# Altium PCB JacdacBrainF4 41.PcbDoc (part 2 of 2)
Units mm, origin at the board's own origin, x right, y up, seen from the top; angles counter-clockwise.
Board outline 19 x 37.35 mm, 2 copper layers (Top Layer, Bottom Layer), stack 1.525 mm thick; 50 components, 34 nets, 190 pads, 37 vias.
Unrouted connection lines stored in the file: 48.
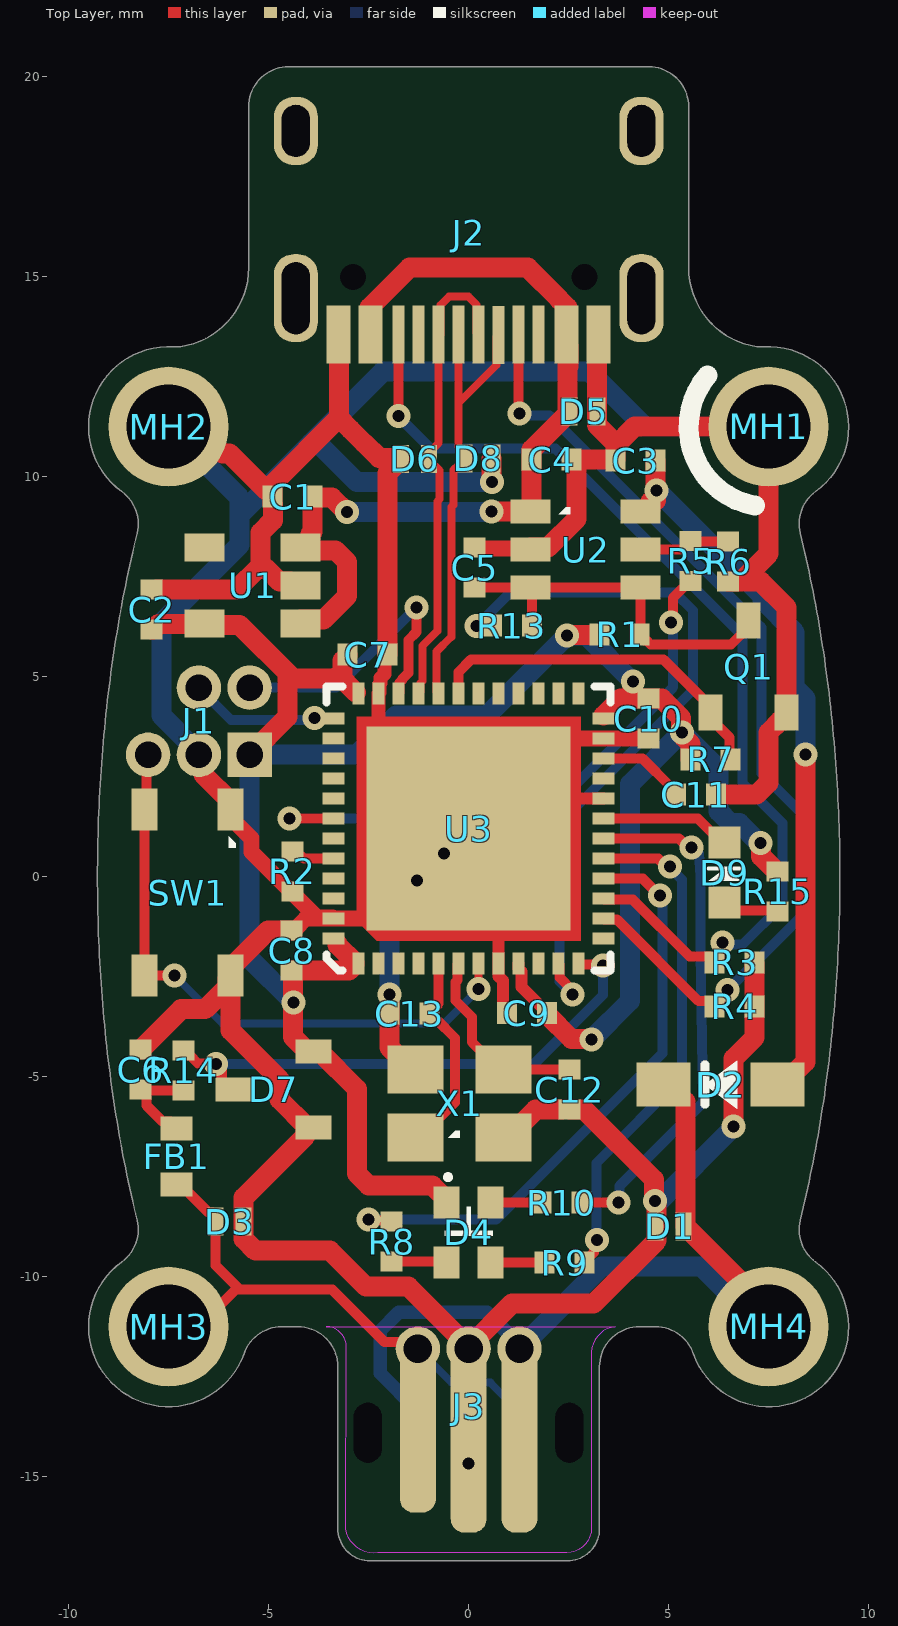
[diagram p0: Top Layer view]

## Via types
v1: diameter 0.6, hole 0.3, Top Layer to Bottom Layer, tented both sides, 37 vias

## Nets (pads, with @x,y where several pads share a name; then routed paths per layer and width w, separated by ;. In a path a pad name is that pad's centre, name@x,y a point inside that pad or via, vN(x,y) a via of type N, cw(c..) or ccw(c..) an arc to the next point about the centre after c; other vN are vias at no path point) (continued)
CC1: (continued)
  Top Layer w0.25: J2.A5 1.25,11.606 v1(1.275,11.581) ; U3.14 3.4,-1.075 3.713,-1.075 5.741,-3.104 6.025,-3.104 R4.1@6.15,-3.229 ; R4.1 R4.1@6.15,-3.229 ; v1(6.475,-2.833) 6.475,-2.9 6.15,-3.225 R4.1@6.15,-3.229
  Bottom Layer w0.25: v1(1.275,11.581) 1.328,11.529 2.026,11.529 7.245,6.309 7.318,6.236 7.318,2.587 8.477,1.428 8.453,1.404 8.453,-0.855 v1(6.475,-2.833)
CC2: J2.B5 R3.1 U3.15 | length 26
  Top Layer w0.25: v1(-1.75,11.517) J2.B5 ; U3.15 3.4,-0.575 4.103,-0.575 5.525,-1.997 6.025,-1.997 6.15,-2.122 R3.1 6.275,-2.015 6.275,-1.816 6.346,-1.745 v1(6.346,-1.65)
  Bottom Layer w0.25: v1(-1.75,11.517) -1.75,11.5 -0.95,10.7 2.169,10.7 6.843,6.026 6.843,2.34 6.859,2.324 7.844,1.339 7.844,-0.701 6.848,-1.697 6.393,-1.697 v1(6.346,-1.65)
GND: C1.1 C2.1 C3.1 C4.1 C5.1 C6.1 C7.1 C8.1 C9.1 C10.1 C11.1 C12.1 C13.1 D1.2 D3.2 D5.2 D6.2 D7.1 D8.2 J1.3 J2.A1 J2.A12 J2.B1 J2.B12 J3.2 MH1.1 MH2.1 Q1.2 R2.1 R3.2 R4.2 R6.1 SW1.1 SW1.2 U1.2 U2.2 U3.8 U3.20 U3.23 U3.35 U3.47 U3.49 X1.2 X1.4 | length 150.2
  Top Layer w0.3: C9.1 0.853,-3.312 0.853,-2.592 0.75,-2.489 U3.8 0.75,0.45 U3.49 0.75,1.95 U3.20
  Top Layer w0.35: C7.1@-2.028,5.547 -2.1,5.475 -2.1,5.074 -2.2,4.974 -2.2,4.838 -2.225,4.813 -2.225,4.6 U3.35 -2.25,3.45 U3.49
  Top Layer w0.4: SW1.2 SW1.2@-5.95,-2.275 ; SW1.1 -5.95,1.475 -5.426,0.951 -5.426,0.616 -3.786,-1.025 -3.4,-1.025 U3.47 -4.08,-1.05 -4.314,-1.284 -4.314,-1.298 -4.364,-1.348 C8.1@-4.389,-1.348 ; U3.47@-3.3,-1.04 -2.24,-1.04 U3.49 ; C5.1 0.175,8.2 U2.2@1.525,8.2 ; U3.49@0.75,1.95 2.25,3.45 U3.23 C10.1@4.375,3.45
  Top Layer w0.5: C6.1 -8.175,-4.325 -8.175,-4.3 -7.187,-3.312 -6.587,-3.312 -6.025,-2.75 -6.025,-2.55 SW1.2 ; C2.1@-7.8,7.175 -5.807,7.175 -5.2,7.782 ; MH2.1 -6.824,11.25 -6.158,10.584 -5.984,10.584 C1.1@-5.06,9.66 ; J1.3 -6.628,2.933 -6.628,2.553 -5.95,1.875 SW1.1 ; SW1.2@-5.95,-2.75 -5.95,-3.845 -4.73,-5.065 -4.73,-5.57 D7.1@-4.025,-6.275 ; SW1.2@-5.95,-2.275 -5.023,-1.348 C8.1@-4.389,-1.348 ; D3.2 -5.625,-9.057 -5.332,-9.35 -3.464,-9.35 -2.564,-10.25 -1.505,-10.25 J3.2@0,-11.755 ; D3.2@-5.625,-8.525 -5.625,-8.025 -4.075,-6.475 -4.075,-6.325 D7.1@-4.025,-6.275 ; -5.2,7.695 -5.2,8.605 -4.895,8.91 -4.895,9.324 -4.9,9.329 C1.1 -4.9,9.82 -3.247,11.473 ; -5.075,7.72 -4.73,7.375 -4.45,7.375 U1.2@-4.3,7.225 ; D7.1 D7.1@-4.025,-6.275 ; J2.B1@-3.247,13.371 -3.247,11.473 ; C7.1 -2.025,10.094 D6.2@-1.672,10.447 ; v1(-1.975,-2.94) C13.1 -1.975,-4.275 -1.425,-4.825 X1.4 ; D6.2@-1.775,10.472 -2.239,10.472 -2.611,10.844 -2.618,10.844 -2.953,11.179 -3.247,11.473 ; J3.2@0,-11.8 J3.2@0,-11.755 ; D8.2@0.568,10.462 0.575,10.455 0.575,9.876 v1(0.583,9.869) ; X1.2 0.975,-6.525 1.675,-5.825 C12.1@2.338,-5.825 ; U2.2@1.525,8.2 1.55,8.225 1.98,8.225 2.7,8.945 2.7,10.425 3.525,10.425 C3.1@3.6,10.5 ; C12.1 2.89,-5.825 4.635,-7.57 4.635,-8.085 v1(4.654,-8.104) ; J2.B12@3.204,13.55 3.204,11.297 3.675,10.827 C3.1@3.675,10.425 ; 3.675,10.783 4.142,11.25 MH1.1 7.5,8.075 6.804,7.379 ; v1@4.7,-8.187 4.7,-9.097 3.122,-10.675 1.08,-10.675 J3.2@0,-11.755 ; C11.1 7.202,2.054 7.494,2.347 7.494,3.607 7.787,3.9 7.9,3.9 7.95,3.95 7.95,6.73 7.303,7.377 R6.1@6.486,7.377 ; v1(6.625,-6.25) 6.625,-4.545 7.15,-4.02 R4.2 ; R4.2@7.15,-3.175 R3.2@7.15,-2.165
  Bottom Layer w0.5: MH2.1 -5.724,9.474 -5.724,9.051 ; J1.3 -6.745,3.095 -7.675,4.025 -7.675,6.349 -5.724,8.3 -5.724,9.051 ; v1(-1.975,-2.94) -1.975,-0.774 v1(-0.62,0.581) ; v1(0.583,9.869) -2.796,9.869 -3.765,10.838 -3.937,10.838 ; v1(4.654,-8.104) 4.673,-8.085 4.79,-8.085 v1@6.606,-6.269 ; MH1.1 4.399,11.25 3.024,12.625 -2.15,12.625 -3.937,10.838 ; -5.724,9.051 -3.937,10.838
  other v1: 0,-14.675 -1.298,-0.097
ILIM_CTRL: R5.1 U3.42 | length 14.9
  Top Layer w0.25: v1(-4.475,1.45) U3.42 ; v1(5.056,6.358) 5.103,6.405 5.103,6.971 5.521,7.389 R5.1
  Bottom Layer w0.25: v1(-4.475,1.45) 1.824,1.45 5.114,4.74 5.114,6.3 v1(5.056,6.358)
ILIM_STATUS: D9.1 U3.19 | length 3.1
  Top Layer w0.25: U3.19 5.73,1.45 D9.1@6.232,0.949
JD_DATA: D3.1 FB1.1 J3.1 MH3.1 | length 10.6
  Top Layer w0.25: MH3.1 -6.756,-11.25 -5.831,-10.325 -3.41,-10.325 -2.1,-11.635 -1.435,-11.635 J3.1@-1.27,-11.8 ; FB1.1 -7.2,-7.7 -6.5,-8.4 -6.4,-8.4 -6.325,-8.475 -6.325,-9.717 -5.717,-10.325
JD_DATA_MCU: D7.3 R14.1 U3.12 | length 13.8
  Top Layer w0.25: R14.1 -7,-4.475 -6.958,-4.475 -6.766,-4.666 -6.333,-4.666 -6.165,-4.835 D7.3@-6.165,-5.175 ; v1@-6.19,-4.86 -6.19,-5.15 D7.3@-6.012,-5.328 ; U3.12 2.775,-2.2 3.332,-2.2 v1(3.357,-2.225)
  Bottom Layer w0.25: v1(-6.322,-4.677) 1.64,-4.677 3.357,-2.96 v1(3.357,-2.225)
JD_PWR: D1.1 D2.1 J3.3 MH4.1 | length 14.8
  Top Layer w0.5: D2.1@4.875,-5.2 5,-5.2 5.422,-5.622 D1.1@5.422,-8.678 ; D1.1@5.425,-8.75 7.5,-10.825 MH4.1
  Bottom Layer w0.5: J3.3@1.27,-11.8 3.32,-9.75 5.818,-9.75 7.318,-11.25 MH4.1
JD_RGB_B: R8.2 U3.16 | length 15.2
  Top Layer w0.25: v1(-2.504,-8.57) -2.477,-8.598 -1.952,-8.598 R8.2 ; U3.16 4.353,-0.05 4.776,-0.473 v1(4.779,-0.473)
  Bottom Layer w0.25: v1(-2.504,-8.57) -0.955,-8.57 -0.95,-8.575 0.681,-8.575 4.84,-4.416 4.84,-0.534 v1(4.779,-0.473)
JD_RGB_G: R9.2 U3.17 | length 12.8
  Top Layer w0.25: R9.2 2.9,-9.625 3.135,-9.39 3.135,-9.152 v1(3.202,-9.085) ; U3.17 4.741,0.45 4.94,0.251 v1(5.029,0.251)
  Bottom Layer w0.25: v1(3.202,-9.085) 3.195,-9.078 3.195,-7.155 5.329,-5.021 5.329,-0.07 5.029,0.23 v1(5.029,0.251)
JD_RGB_R: R10.2 U3.18 | length 13.1
  Top Layer w0.25: R10.2 v1(3.745,-8.15) ; U3.18 5.264,0.95 5.486,0.728 v1(5.575,0.728)
  Bottom Layer w0.25: v1(3.745,-8.15) 3.777,-8.118 3.777,-7.727 5.779,-5.725 5.852,-5.651 5.852,-5.544 5.796,-1.878 5.796,-0.855 5.796,-0.074 5.795,0.016 5.761,0.581 5.664,0.678 v1(5.575,0.728)
JD_STATUS: U3.27
MCU_BOOT0: R2.2 U3.44 | length 1.1
  Top Layer w0.25: R2.2 -4.283,0.506 -4.168,0.506 -4.112,0.45 U3.44
NetC3_2: C3.2 D2.2 U2.6 | length 18.9
  Top Layer w0.5: U2.6 4.5,9.125 4.55,9.175 U2.6@4.55,9.275 ; C3.2 v1@4.675,9.806 ; D2.2@7.725,-5.2 7.85,-5.2 8.416,-4.634 v1(8.416,3.05) ; U2.6@4.55,9.275 4.55,9.375 4.675,9.5 v1@4.675,9.806 ; U2.6@4.55,9.275 4.681,9.406 4.681,9.641 v1(4.7,9.66) 4.681,9.679 4.681,9.8 v1@4.675,9.806
  Bottom Layer w0.5: v1(4.7,9.66) 7.345,7.015 7.345,6.917 8.15,6.111 8.15,4.727 8.416,4.461 v1(8.416,3.05)
NetC5_2: C5.2 Q1.3 R1.2 R13.2 U2.3 U2.4 | length 9.7
  Top Layer w0.25: C5.2 U2.3 ; R13.2 1.58,7.195 U2.3 ; R1.2@4.375,6.05 R1.2 ; R1.2@4.375,6.175 R1.2@4.375,6.15 ; Q1.3 7,6.25 6.558,5.808 4.546,5.808 4.454,5.9 4.4,5.9 4.275,6.025 R1.2 ; U2.3 U2.4 4.3,6.225 R1.2@4.375,6.15 ; R1.2 R1.2@4.375,6.15
NetC6_2: C6.2 FB1.2 R14.2 | length 2.5
  Top Layer w0.25: FB1.2@-7.35,-6.225 -7.45,-6.125 -7.65,-6.125 -8.05,-5.725 -8.05,-5.45 -8.175,-5.325 C6.2 -8.175,-5.35 -8.05,-5.35 R14.2
NetC11_2: C11.2 U3.22 | length 2.2
  Top Layer w0.25: U3.22 4.35,2.95 5.056,2.243 5.056,2.179 C11.2
NetC12_2: C12.2 U3.6 X1.3 | length 4.7
  Top Layer w0.25: U3.6 -0.275,-2.2 -0.275,-2.582 -0.329,-2.636 -0.329,-3.092 0.086,-3.507 0.086,-4.136 0.775,-4.825 X1.3 C12.2@2.313,-4.825
NetC13_2: C13.2 U3.5 X1.1 | length 5.2
  Top Layer w0.25: X1.1 -1.225,-6.525 -0.342,-5.642 -0.342,-4.033 -0.8,-3.575 -0.85,-3.575 -0.975,-3.45 -0.975,-3.4 -0.75,-3.175 U3.5
NetD4_2: D4.2 R10.1 | length 0.9
  Top Layer w0.25: D4.2 1.48,-8.15
NetD4_3: D4.3 R9.1 | length 1.4
  Top Layer w0.25: D4.3 R9.1
NetD4_4: D4.4 R8.1 | length 1.4
  Top Layer w0.25: R8.1 -0.575,-9.625 D4.4
NetD9_2: D9.2 R15.1 | length 1
  Top Layer w0.25: D9.2@6.55,-0.825 6.569,-0.844 R15.1@7.494,-0.844
NetR5_2: R5.2 R6.2 U2.5 | length 2.3
  Top Layer w0.25: U2.5 5.307,8.175 5.521,8.389 R5.2 5.551,8.384 6.479,8.384 R6.2
nRESET: J1.5 SW1.3 SW1.4 U3.7 | length 15.4
  Top Layer w0.2: v1(0.25,-2.805) U3.7
  Top Layer w0.25: J1.5 -8.057,3.008 -8.057,1.717 SW1.3 SW1.4 v1(-7.35,-2.475)
  Bottom Layer w0.2: v1(-7.35,-2.475) -6.15,-3.675 -0.62,-3.675 v1(0.25,-2.805)
SWCLK: J1.4 U3.37 | length 3.2
  Bottom Layer w0.25: J1.4 -5.94,3.921 -3.905,3.921 v1(-3.853,3.973)
SWDIO: J1.2 U3.34 | length 7.3
  Top Layer w0.25: U3.34 -1.725,4.6 -1.725,4.855 -1.65,4.93 -1.65,4.954 -1.505,5.099 -1.505,5.918 -1.31,6.112 v1(-1.31,6.73)
  Bottom Layer w0.25: J1.2 -3.314,4.726 v1(-1.31,6.73)
USB_N: D8.1 J2.A7 J2.B7 U3.32 | length 11.6
  Top Layer w0.2: U3.32 -0.8,4.625 -0.8,4.85 -0.805,4.855 -0.805,5.628 -0.435,5.997 -0.435,9.242 -0.377,9.3 -0.377,10.17 -0.26,10.287 -0.132,10.287 -0.082,10.337 -0.082,10.462 -0.082,10.587 -0.25,10.755 -0.25,11.625 -0.25,11.849 ; J2.A7 -0.25,11.849 ; J2.B7 0.7,13.494 0.7,12.799 -0.25,11.849
USB_P: D6.1 J2.A6 J2.B6 U3.33 | length 12.1
  Top Layer w0.2: U3.33 -1.2,4.625 -1.2,4.842 -1.155,4.887 -1.155,5.773 -0.785,6.142 -0.785,9.387 -0.727,9.445 -0.727,10.155 -0.844,10.272 -0.972,10.272 -1.022,10.322 -1.022,10.447 -0.972,10.497 -0.972,10.622 -0.75,10.844 J2.B6 ; J2.B6@-0.7,13.55 -0.7,14.293 -0.493,14.5 -0.007,14.5 0.2,14.293 0.2,13.6 J2.A6
VUSB: C1.2 C4.2 D5.1 J2.A4 J2.A9 J2.B4 J2.B9 U1.1 U1.3 U2.1 | length 22
  Top Layer w0.5: U1.1@-4.2,6.425 -3.629,6.425 -3.037,7.017 -3.037,7.867 -3.33,8.16 -3.985,8.16 U1.3@-4.05,8.225 ; U1.3 U1.3@-4.05,8.225 ; v1(-3.037,9.122) -3.064,9.122 -3.417,9.475 -3.9,9.475 -3.9,8.618 -3.95,8.568 -3.95,8.325 U1.3@-4.05,8.225 ; J2.A9@-2.479,13.729 -2.479,14.226 -1.48,15.225 1.48,15.225 2.275,14.43 2.275,14.416 J2.A4@2.465,14.226 ; v1(0.568,9.125) U2.1 ; U2.1@1.575,9.15 1.575,10.678 2.475,11.578 2.475,12.75 2.475,13.263 J2.A4@2.475,13.55 ; 2.5,12.75 J2.A4@2.5,13.263
  Bottom Layer w0.5: v1(-3.037,9.122) v1@0.538,9.122
VUSB_SENSE: U3.13
pads on no net: J2.1 J2.2 J2.3 J2.4 J2.A8 J2.B8 J3. U1.4 U3.2 U3.3 U3.4 U3.10 U3.21 U3.25 U3.26 U3.28 U3.29 U3.30 U3.38 U3.39 U3.40 U3.41 U3.43 U3.45 U3.46

## Silkscreen, mask and mechanical layers (free items; w line width, h text height)
Top Overlay:
  lines w0.5: 5.968,12.536 ccw(c7.5,11.25) 7.153,9.28
Bottom Overlay:
  rectangle: -3.4,-2.325 -3.1,-2.025
  rectangle: -3.4,-2.025 -3.1,-1.725
  rectangle: -2.8,-2.025 -1.3,-1.725
  rectangle: -3.4,-1.725 -3.1,-1.425
  rectangle: -2.8,-1.725 -2.5,-1.425
  rectangle: -3.4,-1.425 -3.1,-1.125
  rectangle: -2.8,-1.425 -2.5,-1.125
  rectangle: -3.4,-1.125 -3.1,-0.825
  rectangle: -2.8,-1.125 -2.5,-0.825
  rectangle: -3.4,-0.825 -3.1,-0.525
  rectangle: -2.8,-0.825 -1.3,-0.525
  rectangle: -3.4,-0.525 -3.1,-0.225
  rectangle: -3.4,-0.225 -0.7,0.075
  rectangle: -3.4,0.075 -2.8,0.375
  rectangle: -3.4,0.375 -3.1,0.675
  rectangle: -3.4,0.675 -2.8,0.975
  rectangle: -3.4,0.975 -2.8,1.275
  rectangle: -2.5,0.975 -1.9,1.275
  rectangle: -3.4,1.275 -3.1,1.575
  rectangle: -2.8,1.275 -1.9,1.575
  rectangle: -3.4,1.575 -0.7,1.875
  rectangle: -3.4,1.875 -3.1,2.175
  rectangle: -3.4,2.175 -3.1,2.475
  rectangle: -3.4,2.475 -3.1,2.775
  rectangle: -2.8,2.475 -2.5,2.775
  rectangle: -3.4,2.775 -3.1,3.075
  rectangle: -2.8,2.775 -2.5,3.075
  rectangle: -3.4,3.075 -3.1,3.375
  rectangle: -2.8,3.075 -2.5,3.375
  rectangle: -3.4,3.375 -3.1,3.675
  rectangle: -2.8,3.375 -1.3,3.675
  rectangle: -3.4,3.675 -3.1,3.975
  rectangle: -1,-2.325 -0.7,-2.025
  rectangle: -1,-2.025 -0.4,-1.725
  rectangle: -1.6,-1.725 -1.3,-1.425
  rectangle: -1,-1.725 -0.4,-1.425
  rectangle: -1.6,-1.425 -1.3,-1.125
  rectangle: -1,-1.425 -0.4,-1.125
  rectangle: -1.6,-1.125 -1.3,-0.825
  rectangle: -1,-1.125 -0.7,-0.825
  rectangle: -1,-0.825 -0.1,-0.525
  rectangle: -1,-0.525 -0.7,-0.225
  rectangle: -0.4,-0.525 -0.1,-0.225
  rectangle: -1.9,0.075 -1.3,0.375
  rectangle: -2.2,0.375 -1,0.675
  rectangle: -2.2,0.675 -1.9,0.975
  rectangle: -1.6,0.675 -1.3,0.975
  rectangle: -1,0.675 -0.7,0.975
  rectangle: -1.6,0.975 -1,1.275
  rectangle: -0.7,0.975 -0.4,1.275
  rectangle: -1.6,1.275 -1.3,1.575
  rectangle: -1,1.875 -0.7,2.175
  rectangle: -0.4,1.875 -0.1,2.175
  rectangle: -2.8,2.175 -1.3,2.475
  rectangle: -1,2.175 -0.7,2.475
  rectangle: -1.6,2.475 -1.3,2.775
  rectangle: -1,2.475 -0.7,2.775
  rectangle: -1.6,2.775 -1.3,3.075
  rectangle: -1,2.775 -0.7,3.075
  rectangle: -0.4,2.775 -0.1,3.075
  rectangle: -1.6,3.075 -1.3,3.375
  rectangle: -1,3.075 -0.4,3.375
  rectangle: -1,3.375 -0.4,3.675
  rectangle: -1,3.675 -0.7,3.975
  rectangle: -3.4,-2.625 3.5,-2.325
  rectangle: -0.4,-2.325 0.2,-2.025
  rectangle: 1.1,-2.325 1.4,-2.025
  rectangle: -0.1,-1.725 0.2,-1.425
  rectangle: -0.1,-1.125 0.2,-0.825
  rectangle: 0.5,-1.125 1.1,-0.825
  rectangle: 0.5,-0.825 0.8,-0.525
  rectangle: 0.2,-0.525 0.5,-0.225
  rectangle: 0.8,-0.525 1.4,-0.225
  rectangle: 0.2,-0.225 0.5,0.075
  rectangle: 0.8,-0.225 1.1,0.075
  rectangle: -1,0.075 0.5,0.375
  rectangle: 0.8,0.075 1.1,0.375
  rectangle: -0.7,0.375 0.5,0.675
  rectangle: 0.8,0.375 1.4,0.675
  rectangle: -0.1,0.675 0.2,0.975
  rectangle: 0.5,0.975 1.7,1.275
  rectangle: -0.4,1.275 0.2,1.575
  rectangle: -0.1,1.575 0.2,1.875
  rectangle: 0.2,1.875 0.5,2.175
  rectangle: 0.8,1.875 1.1,2.175
  rectangle: -0.4,2.175 0.5,2.475
  rectangle: 0.8,2.175 1.1,2.475
  rectangle: 0.2,2.475 0.5,2.775
  rectangle: 0.8,2.475 1.1,2.775
  rectangle: 1.4,2.475 1.7,2.775
  rectangle: 0.8,2.775 1.1,3.075
  rectangle: 0.8,3.075 1.1,3.375
  rectangle: 0.5,3.375 1.1,3.675
  rectangle: -0.4,3.675 0.2,3.975
  rectangle: 0.5,3.675 1.1,3.975
  rectangle: -3.4,3.975 3.5,4.275
  rectangle: 2.3,-2.325 2.6,-2.025
  rectangle: 3.2,-2.325 3.5,-2.025
  rectangle: 2,-2.025 2.3,-1.725
  rectangle: 3.2,-2.025 3.5,-1.725
  rectangle: 2.6,-2.025 2.9,-1.725
  rectangle: 0.5,-1.725 3.5,-1.425
  rectangle: 0.8,-1.425 2.6,-1.125
  rectangle: 3.2,-1.425 3.5,-1.125
  rectangle: 1.4,-1.125 1.7,-0.825
  rectangle: 2.9,-1.125 3.5,-0.825
  rectangle: 2.3,-1.125 2.6,-0.825
  rectangle: 1.1,-0.825 2.3,-0.525
  rectangle: 3.2,-0.825 3.5,-0.525
  rectangle: 2.6,-0.825 2.9,-0.525
  rectangle: 1.7,-0.525 3.5,-0.225
  rectangle: 1.4,-0.225 2,0.075
  rectangle: 1.4,2.775 1.7,3.075
  rectangle: 1.4,3.075 1.7,3.375
  rectangle: 1.4,0.675 2,0.975
  rectangle: 0.8,1.575 3.5,1.875
  rectangle: 1.7,0.375 2.6,0.675
  rectangle: 1.4,3.375 2.9,3.675
  rectangle: 1.4,2.175 2.9,2.475
  rectangle: 2,0.075 2.6,0.375
  rectangle: 2,0.975 2.6,1.275
  rectangle: 2.3,1.275 2.9,1.575
  rectangle: 2.6,0.675 2.9,0.975
  rectangle: 2.6,3.075 2.9,3.375
  rectangle: 2.6,2.475 2.9,2.775
  rectangle: 2.6,2.775 2.9,3.075
  rectangle: 2.6,-0.225 3.5,0.075
  rectangle: 2.9,0.375 3.5,0.675
  rectangle: 2.9,0.975 3.5,1.275
  rectangle: 3.2,0.075 3.5,0.375
  rectangle: 3.2,0.675 3.5,0.975
  rectangle: 3.2,1.275 3.5,1.575
  rectangle: 3.2,1.875 3.5,2.175
  rectangle: 3.2,3.075 3.5,3.375
  rectangle: 3.2,2.775 3.5,3.075
  rectangle: 3.2,2.175 3.5,2.475
  rectangle: 3.2,3.375 3.5,3.675
  rectangle: 3.2,2.475 3.5,2.775
  rectangle: 3.2,3.675 3.5,3.975
  region: -3.113,7.372 -3.113,6.21 -1.088,6.21 -1.088,7.372
  region: 3.275,14.3 3.275,17.725 -3.425,17.725 -3.425,14.3
  text "JacdacBrainF4" at 5.3,7.5 h1
  text "'.ProjectCodenameID'-'.ProjectRevision'" at 4.091,6.298 h1
Dimension:
  drawing of 232 lines, arcs and shapes, not listed
Board Outline:
  drawing of 232 lines, arcs and shapes, not listed
Top Assy:
  drawing of 232 lines, arcs and shapes, not listed
Bottom Assy:
  drawing of 232 lines, arcs and shapes, not listed

## Dimensions
2.471,-17.1 to -4.5,20.25 on Dimension
-9.281,0 to 9.281,0 on Dimension
-7.5,-11.25 to -7.5,11.25 on Dimension
-7.5,-11.25 to 7.5,-11.25 on Dimension
-3.27,-16.301 to 3.27,-16.301 on Dimension

## Text inside footprints (layer, text, board x,y; h text height)
J3: Mechanical 9 "JACDAC  / cable connector  / body" at 4.796,-22.454 h1.7 r180; Alignment "board outline  / for 'outie'" at -9.764,-14.175 h1.2; Alignment "board outline  / for 'innie'" at -10.164,-11.9 h1.2
MH1: Assembly Notes "board outline can  / be on 2.0mm   / radius if necessary" at 10.199,-7.27 h0.5; Assembly Notes "5mm dia keepout  / for traces and  / components to  / allow space for  / bushes/standoffs/ / nuts/screw heads" at 10.525,-2.975 h0.5